# Altium PCB 驱动板.PcbDoc (part 2 of 3)
Units mil, origin at the board's own origin, x right, y up, seen from the top; angles counter-clockwise.
Board outline 6410.42 x 3130.03 mil, 2 copper layers (Top Layer, Bottom Layer); 60 components, 47 nets, 216 pads, 52 vias.
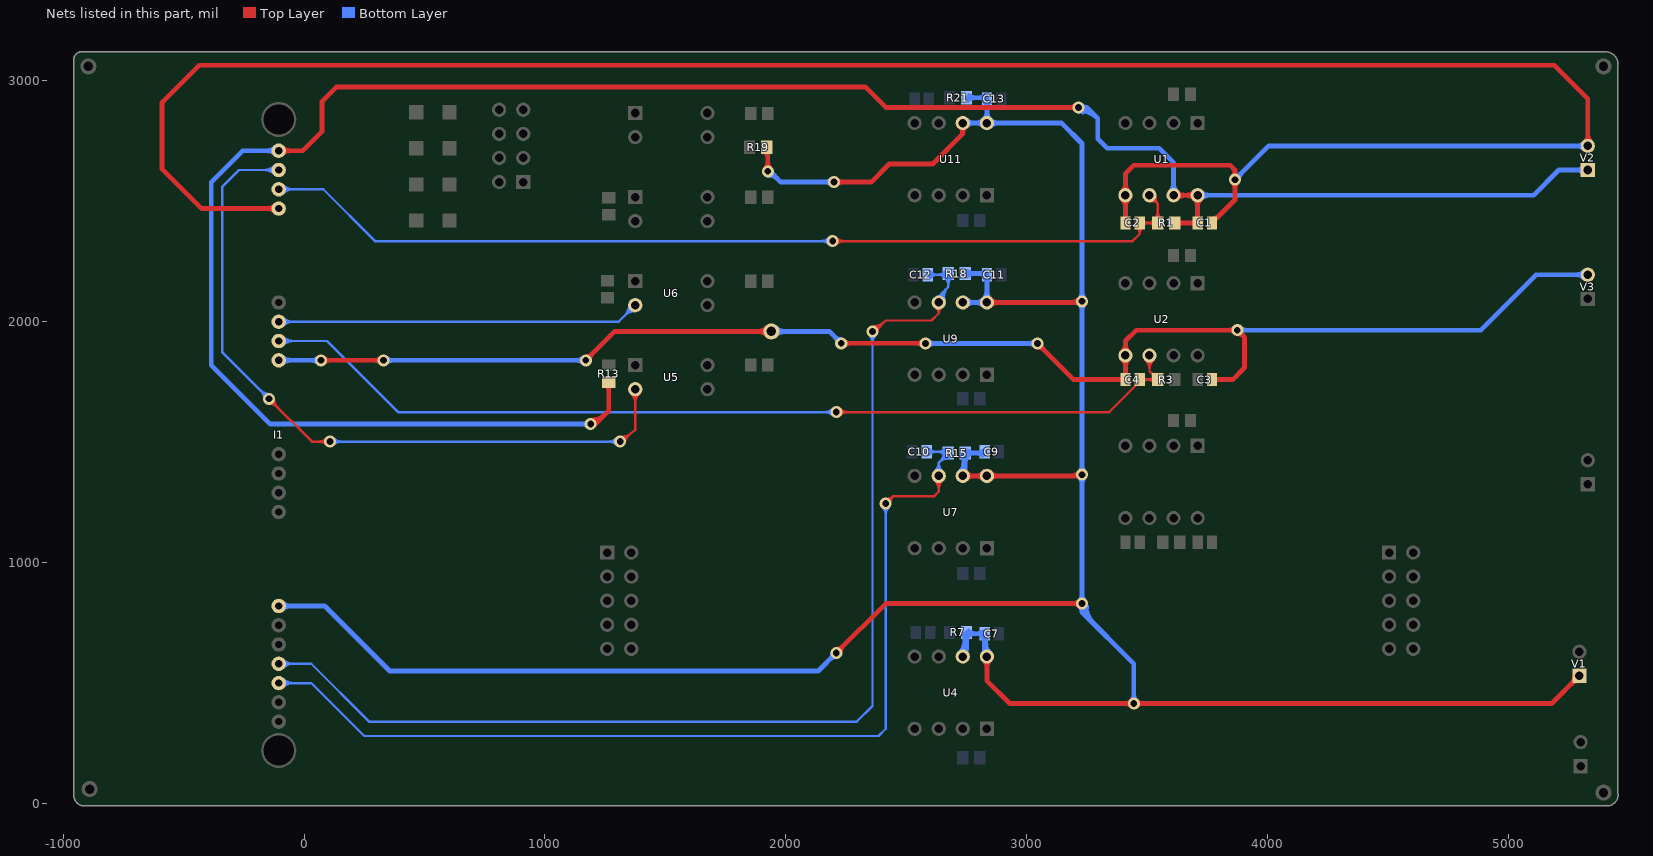
[diagram p2: the nets of this part, all layers, seen from the top]

## Via types
v1: diameter 50, hole 28, Top Layer to Bottom Layer, 52 vias

## Nets (pads, with @x,y where several pads share a name; then routed paths per layer and width w, separated by ;. In a path a pad name is that pad's centre, name@x,y a point inside that pad or via, vN(x,y) a via of type N, cw(c..) or ccw(c..) an arc to the next point about the centre after c; other vN are vias at no path point) (continued)
IPM_NVCC: C7.2 C9.2 C11.2 C13.2 I1.13 R7.1 R15.1 R18.1 R19.2 R21.1 U4.7 U4.8 U7.7 U7.8 U9.7 U9.8 U11.7 U11.8 V1.1 | length 18998.4
  Top Layer w20: v1(1925.43,2624.57) R19.2@1925.43,2725 ; v1(2200,2580) 2355,2580 2430,2655 2610,2655 2735,2780 ; v1(2210,625) 2415,830 v1(3230,830) ; U7.7@2735,1360 U7.8@2835,1360 3225,1360 v1(3230,1365) ; U11.7@2735,2825 2735,2780 ; U4.8@2835,610 2835,510 2930,415 5180,415 V1.1@5295,530 ; U9.8@2835,2080 3225,2080 v1(3230,2085) ; 1925.43,2660.78 cw(c1889.22,2660.78) 1914.83,2635.17 ccw(c1889.22,2660.78) 1925.43,2660.78 ; 1925.43,2660.78 ccw(c1961.65,2660.78) 1936.04,2635.17 cw(c1961.65,2660.78) 1925.43,2660.78 ; 2235.61,650.61 cw(c2210,676.21) 2210,640 ccw(c2210,676.21) 2235.61,650.61 ; 2235.61,650.61 ccw(c2261.21,625) 2225,625 cw(c2261.21,625) 2235.61,650.61 ; 2236.21,2580 cw(c2236.21,2616.21) 2210.61,2590.61 ccw(c2236.21,2616.21) 2236.21,2580 ; 2236.21,2580 ccw(c2236.21,2543.79) 2210.61,2569.39 cw(c2236.21,2543.79) 2236.21,2580 ; 2735,2780 cw(c2777.08,2780) 2748.34,2810.74 ccw(c2777.08,2780) 2735,2780 ; 2735,2780 ccw(c2692.92,2780) 2721.66,2810.74 cw(c2692.92,2780) 2735,2780 ; 2782.14,1360 cw(c2782.14,1407.14) 2748.81,1373.81 ccw(c2782.14,1407.14) 2782.14,1360 ; 2782.14,1360 ccw(c2782.14,1312.86) 2748.81,1346.19 cw(c2782.14,1312.86) 2782.14,1360 ; 2787.86,1360 cw(c2787.86,1312.86) 2821.19,1346.19 ccw(c2787.86,1312.86) 2787.86,1360 ; 2787.86,1360 ccw(c2787.86,1407.14) 2821.19,1373.81 cw(c2787.86,1407.14) 2787.86,1360 ; 2835,562.86 cw(c2882.14,562.86) 2848.81,596.19 ccw(c2882.14,562.86) 2835,562.86 ; 2835,562.86 ccw(c2787.86,562.86) 2821.19,596.19 cw(c2787.86,562.86) 2835,562.86 ; 2882.14,1360 cw(c2882.14,1407.14) 2848.81,1373.81 ccw(c2882.14,1407.14) 2882.14,1360 ; 2882.14,1360 ccw(c2882.14,1312.86) 2848.81,1346.19 cw(c2882.14,1312.86) 2882.14,1360 ; 2882.14,2080 cw(c2882.14,2127.14) 2848.81,2093.81 ccw(c2882.14,2127.14) 2882.14,2080 ; 2882.14,2080 ccw(c2882.14,2032.86) 2848.81,2066.19 cw(c2882.14,2032.86) 2882.14,2080 ; 3193.79,830 cw(c3193.79,793.79) 3219.39,819.39 ccw(c3193.79,793.79) 3193.79,830 ; 3193.79,830 ccw(c3193.79,866.21) 3219.39,840.61 cw(c3193.79,866.21) 3193.79,830 ; 3408.79,415 cw(c3408.79,378.79) 3434.39,404.39 ccw(c3408.79,378.79) 3408.79,415 ; 3408.79,415 ccw(c3408.79,451.21) 3434.39,425.61 cw(c3408.79,451.21) 3408.79,415 ; 3481.21,415 cw(c3481.21,451.21) 3455.61,425.61 ccw(c3481.21,451.21) 3481.21,415 ; 3481.21,415 ccw(c3481.21,378.79) 3455.61,404.39 cw(c3481.21,378.79) 3481.21,415 ; 5261.66,496.66 cw(c5295,463.33) 5295,510.47 ccw(c5295,463.33) 5261.66,496.66 ; 5261.66,496.66 ccw(c5228.33,530) 5275.47,530 cw(c5228.33,530) 5261.66,496.66 ; R19.2@1910.8,2711.43 cw(c1875.48,2676.11) 1925.43,2676.11 ccw(c1875.48,2676.11) R19.2@1910.8,2711.43 ; 3181.72,1360 ccw(c3181.72,1413.28) 3219.39,1375.61 cw(c3181.72,1413.28) 3181.72,1360 ; 3181.72,2080 ccw(c3181.72,2133.28) 3219.39,2095.61 cw(c3181.72,2133.28) 3181.72,2080
  Bottom Layer w20: I1.13@-105,820 85,820 355,550 2135,550 v1(2210,625) ; v1(1925.43,2624.57) 1935.43,2624.57 1980,2580 v1(2200,2580) ; U4.7@2735,610 2735,630 2750.43,645.43 ; U7.7@2735,1360 2745.43,1370.43 R15.1@2745.43,1455 2820.47,1455 C9.2@2825.47,1460 ; U9.7@2735,2080 U9.8@2835,2080 2835.47,2080.47 C11.2@2835.47,2195 2830.47,2200 R18.1@2745.43,2200 ; U11.7@2735,2825 U11.8@2835,2825 ; 2741.58,659.13 ccw(c2765,645.61) U4.7@2747.58,624.94 ; R21.1@2750.43,2930 2830.47,2930 C13.2@2835.47,2925 2835,2924.53 U11.8@2835,2825 ; U4.8@2835,610 2825.47,619.53 C7.2@2825.47,705 2755.43,705 R7.1@2750.43,710 2750.43,645.43 ; 3231.69,805.03 ccw(c3212.64,799.93) 3222.5,817.01 cw(c3179.66,742.81) 3262.42,764.98 ; v1@3232.5,834.33 cw(c3213.8,801.94) 3249.92,811.62 ; 3232.54,801.87 cw(c3246.49,805.61) v1@3238.4,817.57 ; v1(3445,415) 3445,580 3230,795 ; -56.72,820 cw(c-56.72,868.28) -90.86,834.14 ccw(c-56.72,868.28) -56.72,820 ; -56.72,820 ccw(c-56.72,771.72) -90.86,805.86 cw(c-56.72,771.72) -56.72,820 ; 2163.79,2580 cw(c2163.79,2543.79) 2189.39,2569.39 ccw(c2163.79,2543.79) 2163.79,2580 ; 2163.79,2580 ccw(c2163.79,2616.21) 2189.39,2590.61 cw(c2163.79,2616.21) 2163.79,2580 ; 2184.39,599.39 cw(c2210,573.79) 2210,610 ccw(c2210,573.79) 2184.39,599.39 ; 2184.39,599.39 ccw(c2158.79,625) 2195,625 cw(c2158.79,625) 2184.39,599.39 ; R15.1@2733.64,1444.25 cw(c2690.82,1419.53) 2738.57,1406.73 ; R15.1@2733.64,1444.25 cw(c2690.82,1419.53) 2738.57,1406.73 ; R15.1@2733.64,1444.25 cw(c2690.82,1419.53) 2738.57,1406.73 ; R7.1@2738.64,699.25 cw(c2701.23,677.66) 2742.95,666.48 ; R7.1@2738.64,699.25 cw(c2701.23,677.66) 2742.95,666.48 ; R7.1@2738.64,699.25 cw(c2701.23,677.66) 2742.95,666.48 ; 2745.43,1418.18 cw(c2778.32,1418.18) 2755.06,1441.43 ccw(c2778.32,1418.18) 2745.43,1418.18 ; 2745.43,1418.18 ccw(c2712.55,1418.18) 2735.8,1441.43 cw(c2712.55,1418.18) 2745.43,1418.18 ; 2746.72,680.56 cw(c2768.53,674.71) R7.1@2757.24,694.27 ; 2746.72,680.56 cw(c2768.53,674.71) R7.1@2757.24,694.27 ; 2746.72,680.56 cw(c2768.53,674.71) R7.1@2757.24,694.27 ; 2750.43,645.43 cw(c2734.52,645.43) 2734.74,629.53 ccw(c2734.52,645.43) 2750.43,645.43 ; 2750.43,645.43 ccw(c2762.11,633.75) 2749.69,622.87 cw(c2762.11,633.75) 2750.43,645.43 ; 2750.43,673.18 cw(c2783.32,673.18) R7.1@2760.06,696.43 ; 2750.43,673.18 ccw(c2717.55,673.18) 2740.8,696.43 cw(c2717.55,673.18) 2750.43,673.18 ; 2750.43,673.18 cw(c2783.32,673.18) R7.1@2760.06,696.43 ; R7.1@2760.06,696.43 cw(c2780.75,675.74) 2780.75,705 ccw(c2780.75,675.74) R7.1@2760.06,696.43 ; 2778.32,1455 cw(c2778.32,1487.89) 2755.06,1464.63 ccw(c2778.32,1487.89) 2778.32,1455 ; 2778.32,1455 ccw(c2778.32,1422.11) 2755.06,1445.37 cw(c2778.32,1422.11) 2778.32,1455 ; 2778.32,2200 cw(c2778.32,2232.89) 2755.06,2209.63 ccw(c2778.32,2232.89) 2778.32,2200 ; 2778.32,2200 ccw(c2778.32,2167.11) 2755.06,2190.37 cw(c2778.32,2167.11) 2778.32,2200 ; 2782.14,2080 cw(c2782.14,2127.14) 2748.81,2093.81 ccw(c2782.14,2127.14) 2782.14,2080 ; 2782.14,2080 ccw(c2782.14,2032.86) 2748.81,2066.19 cw(c2782.14,2032.86) 2782.14,2080 ; 2782.14,2825 cw(c2782.14,2872.14) 2748.81,2838.81 ccw(c2782.14,2872.14) 2782.14,2825 ; 2782.14,2825 ccw(c2782.14,2777.86) 2748.81,2811.19 cw(c2782.14,2777.86) 2782.14,2825 ; 2783.32,2930 cw(c2783.32,2962.89) 2760.06,2939.63 ccw(c2783.32,2962.89) 2783.32,2930 ; 2783.32,2930 ccw(c2783.32,2897.11) 2760.06,2920.37 cw(c2783.32,2897.11) 2783.32,2930 ; 2787.86,2080 cw(c2787.86,2032.86) 2821.19,2066.19 ccw(c2787.86,2032.86) 2787.86,2080 ; 2787.86,2080 ccw(c2787.86,2127.14) U9.8@2821.19,2093.81 ; 2787.86,2080 ccw(c2787.86,2127.14) U9.8@2821.19,2093.81 ; 2787.86,2825 cw(c2787.86,2777.86) 2821.19,2811.19 ccw(c2787.86,2777.86) 2787.86,2825 ; 2787.86,2825 ccw(c2787.86,2872.14) U11.8@2821.19,2838.81 ; 2787.86,2825 ccw(c2787.86,2872.14) U11.8@2821.19,2838.81 ; 2797.34,705 cw(c2797.34,676.87) 2817.23,696.76 ccw(c2797.34,676.87) 2797.34,705 ; 2797.34,705 ccw(c2797.34,733.13) 2817.23,713.24 cw(c2797.34,733.13) 2797.34,705 ; U9.8@2821.19,2093.81 ccw(c2786.72,2128.28) 2835.47,2128.28 cw(c2786.72,2128.28) U9.8@2821.19,2093.81 ; U11.8@2821.19,2838.81 ccw(c2787.86,2872.14) 2835,2872.14 ; U11.8@2821.19,2838.81 ccw(c2787.86,2872.14) 2835,2872.14 ; 2825.47,670.96 cw(c2853.61,670.96) 2833.71,690.85 ccw(c2853.61,670.96) 2825.47,670.96 ; 2825.47,670.96 ccw(c2797.34,670.96) 2817.23,690.85 cw(c2797.34,670.96) 2825.47,670.96 ; 2831.08,659.21 cw(c2874.43,670.83) C7.2@2835.56,693.27 ; 2831.08,659.21 cw(c2874.43,670.83) C7.2@2835.56,693.27 ; 2831.08,659.21 cw(c2874.43,670.83) C7.2@2835.56,693.27 ; U11.8@2835,2825 3145,2825 3230,2740 v1(3230,2085) v1(3230,1365) 3230,795 ; 2835,2872.14 ccw(c2882.14,2872.14) U11.8@2848.81,2838.81 ; 2835,2872.14 ccw(c2882.14,2872.14) U11.8@2848.81,2838.81 ; 2835.47,2160.96 cw(c2863.61,2160.96) 2843.71,2180.85 ccw(c2863.61,2160.96) 2835.47,2160.96 ; 2835.47,2160.96 ccw(c2807.34,2160.96) 2827.23,2180.85 cw(c2807.34,2160.96) 2835.47,2160.96 ; U11.8@2848.81,2838.81 ccw(c2882.14,2872.14) 2882.14,2825 ; U11.8@2848.81,2838.81 ccw(c2882.14,2872.14) 2882.14,2825 ; 2882.14,2825 ccw(c2882.14,2777.86) 2848.81,2811.19 cw(c2882.14,2777.86) 2882.14,2825 ; 3230,795 cw(c3263.33,795) 3240.34,819.14 ccw(c3263.33,795) 3230,795 ; 3230,795 ccw(c3196.67,795) 3219.66,819.14 cw(c3196.67,795) 3230,795 ; 3230,866.21 cw(c3193.79,866.21) 3219.39,840.61 ccw(c3193.79,866.21) 3230,866.21 ; 3230,866.21 ccw(c3266.21,866.21) 3240.61,840.61 cw(c3266.21,866.21) 3230,866.21 ; 3230,1328.79 cw(c3266.21,1328.79) 3240.61,1354.39 ccw(c3266.21,1328.79) 3230,1328.79 ; 3230,1328.79 ccw(c3193.79,1328.79) 3219.39,1354.39 cw(c3193.79,1328.79) 3230,1328.79 ; 3230,1401.21 cw(c3193.79,1401.21) 3219.39,1375.61 ccw(c3193.79,1401.21) 3230,1401.21 ; 3230,1401.21 ccw(c3266.21,1401.21) 3240.61,1375.61 cw(c3266.21,1401.21) 3230,1401.21 ; 3230,2048.79 cw(c3266.21,2048.79) 3240.61,2074.39 ccw(c3266.21,2048.79) 3230,2048.79 ; 3230,2048.79 ccw(c3193.79,2048.79) 3219.39,2074.39 cw(c3193.79,2048.79) 3230,2048.79 ; 3230,2121.21 cw(c3193.79,2121.21) 3219.39,2095.61 ccw(c3193.79,2121.21) 3230,2121.21 ; 3230,2121.21 ccw(c3266.21,2121.21) 3240.61,2095.61 cw(c3266.21,2121.21) 3230,2121.21 ; 3445,451.21 cw(c3408.79,451.21) 3434.39,425.61 ccw(c3408.79,451.21) 3445,451.21 ; 3445,451.21 ccw(c3481.21,451.21) 3455.61,425.61 cw(c3481.21,451.21) 3445,451.21 ; v1@1925.43,2609.57 cw(c1925.43,2549.21) 1968.11,2591.89 ccw(c1925.43,2549.21) v1@1925.43,2609.57 ; U4.7@2721.19,623.81 ccw(c2650.6,694.4) 2750.43,694.4 cw(c2650.6,694.4) U4.7@2721.19,623.81 ; U7.7@2721.19,1373.81 ccw(c2662.67,1432.33) 2745.43,1432.33 cw(c2662.67,1432.33) U7.7@2721.19,1373.81 ; U4.7@2735.33,609.67 ccw(c2698.88,646.12) 2750.43,646.12 cw(c2698.88,646.12) U4.7@2735.33,609.67 ; R7.1@2760.06,715.7 ccw(c2785.88,741.52) 2785.88,705 cw(c2785.88,741.52) R7.1@2760.06,715.7 ; 2795.15,1455 cw(c2795.15,1423.77) 2817.23,1445.85 ccw(c2795.15,1423.77) 2795.15,1455 ; 2799.52,1455 ccw(c2799.52,1480.04) 2817.23,1462.33 cw(c2799.52,1480.04) 2799.52,1455 ; 2805.15,2200 ccw(c2805.15,2231.23) 2827.23,2209.15 cw(c2805.15,2231.23) 2805.15,2200 ; 2805.15,2930 ccw(c2805.15,2961.23) 2827.23,2939.15 cw(c2805.15,2961.23) 2805.15,2930 ; 2809.52,2200 cw(c2809.52,2174.96) 2827.23,2192.67 ccw(c2809.52,2174.96) 2809.52,2200 ; 2809.52,2930 cw(c2809.52,2904.96) 2827.23,2922.67 ccw(c2809.52,2904.96) 2809.52,2930 ; C7.2@2825.47,680.15 ccw(c2905.15,680.15) 2848.81,623.81 cw(c2905.15,680.15) C7.2@2825.47,680.15 ; C13.2@2827.23,2910.85 cw(c2808.48,2892.1) 2835,2892.1 ccw(c2808.48,2892.1) C13.2@2827.23,2910.85 ; 2835,2889.82 cw(c2864.75,2889.82) 2843.71,2910.85 ccw(c2864.75,2889.82) 2835,2889.82 ; 2835.47,2126 ccw(c2881,2126) 2848.81,2093.81 cw(c2881,2126) 2835.47,2126 ; v1@3225,830 ccw(c3297.43,830) 3246.21,778.79 cw(c3297.43,830) v1@3225,830 ; v1@3245,830 ccw(c3365.71,830) 3280.36,744.64 cw(c3365.71,830) v1@3245,830
IPM_UFO: I1.2 U5.2 | length 4735
  Top Layer w10: -119.8,1653.25 cw(c-110.76,1687.01) v1(-145,1680) ; -118.25,1654.8 ccw(c-152.01,1645.76) v1(-145,1680) ; v1(107.5,1502.5) 32.5,1502.5 v1(-145,1680) ; v1@1304.59,1508.62 cw(c1337.65,1483.02) 1332.38,1524.5 ; 1339.65,1517.28 cw(c1316.84,1526.86) v1(1312.5,1502.5) 1375,1550 U5.2@1375,1720 ; -110.86,1645.86 cw(c-76.72,1680) -125,1680 ccw(c-76.72,1680) -110.86,1645.86 ; -110.86,1645.86 ccw(c-145,1611.72) -145,1660 cw(c-145,1611.72) -110.86,1645.86 ; 59.22,1502.5 cw(c59.22,1454.22) 93.36,1488.36 ccw(c59.22,1454.22) 59.22,1502.5 ; 59.22,1502.5 ccw(c59.22,1550.78) 93.36,1516.64 cw(c59.22,1550.78) 59.22,1502.5 ; 1350.94,1531.72 cw(c1321.73,1570.16) 1315.2,1522.32 ccw(c1321.73,1570.16) 1350.94,1531.72 ; 1350.94,1531.72 ccw(c1380.16,1493.27) 1332.32,1499.8 cw(c1380.16,1493.27) 1350.94,1531.72 ; 1375,1660.79 cw(c1434.21,1660.79) 1392.34,1702.66 ccw(c1434.21,1660.79) 1375,1660.79 ; 1375,1660.79 ccw(c1315.79,1660.79) 1357.66,1702.66 cw(c1315.79,1660.79) 1375,1660.79 ; 1375,1684.93 cw(c1410.07,1684.93) 1385.27,1709.73 ccw(c1410.07,1684.93) 1375,1684.93 ; 1375,1684.93 ccw(c1339.93,1684.93) 1364.73,1709.73 cw(c1339.93,1684.93) 1375,1684.93
  Bottom Layer w10: -171.75,1705.2 ccw(c-137.99,1714.24) v1(-145,1680) ; -170.2,1706.75 cw(c-179.24,1672.99) v1(-145,1680) ; I1.2@-105,2630 -270,2630 -340,2560 -340,1875 v1(-145,1680) ; v1(107.5,1502.5) v1(1312.5,1502.5) ; -179.14,1714.14 cw(c-213.28,1680) -165,1680 ccw(c-213.28,1680) -179.14,1714.14 ; -179.14,1714.14 ccw(c-145,1748.28) -145,1700 cw(c-145,1748.28) -179.14,1714.14 ; -165.36,2630 cw(c-165.36,2569.64) -122.68,2612.32 ccw(c-165.36,2569.64) -165.36,2630 ; -165.36,2630 ccw(c-165.36,2690.36) -122.68,2647.68 cw(c-165.36,2690.36) -165.36,2630 ; -141.21,2630 cw(c-141.21,2593.79) -115.61,2619.39 ccw(c-141.21,2593.79) -141.21,2630 ; -141.21,2630 ccw(c-141.21,2666.21) -115.61,2640.61 cw(c-141.21,2666.21) -141.21,2630 ; 155.78,1502.5 cw(c155.78,1550.78) 121.64,1516.64 ccw(c155.78,1550.78) 155.78,1502.5 ; 155.78,1502.5 ccw(c155.78,1454.22) 121.64,1488.36 cw(c155.78,1454.22) 155.78,1502.5 ; 1264.22,1502.5 cw(c1264.22,1454.22) 1298.36,1488.36 ccw(c1264.22,1454.22) 1264.22,1502.5 ; 1264.22,1502.5 ccw(c1264.22,1550.78) 1298.36,1516.64 cw(c1264.22,1550.78) 1264.22,1502.5
IPM_UGND: C1.1 C2.1 I1.4 U1.5 V2.2 | length 10771.4
  Top Layer w20: I1.4@-105,2470 -425,2470 -590,2635 -590,2910 -435,3065 5190,3065 5330,2925 V2.2@5330,2730 ; C2.1@3410.47,2410 3410.47,2524.53 U1.5@3410,2525 3410,2615 3445,2650 3845,2650 3865,2630 v1(3865,2590) 3865,2505.47 C1.1@3769.53,2410 ; -153.28,2470 cw(c-153.28,2421.72) -119.14,2455.86 ccw(c-153.28,2421.72) -153.28,2470 ; -153.28,2470 ccw(c-153.28,2518.28) -119.14,2484.14 cw(c-153.28,2518.28) -153.28,2470 ; 3410,2572.14 cw(c3362.86,2572.14) 3396.19,2538.81 ccw(c3362.86,2572.14) 3410,2572.14 ; 3410,2572.14 ccw(c3457.14,2572.14) 3423.81,2538.81 cw(c3457.14,2572.14) 3410,2572.14 ; 3410.47,2444.04 cw(c3382.34,2444.04) 3402.23,2424.15 ccw(c3382.34,2444.04) 3410.47,2444.04 ; 3410.47,2444.04 ccw(c3438.61,2444.04) 3418.71,2424.15 cw(c3438.61,2444.04) 3410.47,2444.04 ; 3865,2553.79 cw(c3901.21,2553.79) 3875.61,2579.39 ccw(c3901.21,2553.79) 3865,2553.79 ; 3865,2553.79 ccw(c3828.79,2553.79) 3854.39,2579.39 cw(c3828.79,2553.79) 3865,2553.79 ; 3865,2626.21 cw(c3828.79,2626.21) 3854.39,2600.61 ccw(c3828.79,2626.21) 3865,2626.21 ; 3865,2626.21 ccw(c3901.21,2626.21) 3875.61,2600.61 cw(c3901.21,2626.21) 3865,2626.21 ; 5330,2777.14 cw(c5282.86,2777.14) 5316.19,2743.81 ccw(c5282.86,2777.14) 5330,2777.14 ; 5330,2777.14 ccw(c5377.14,2777.14) 5343.81,2743.81 cw(c5377.14,2777.14) 5330,2777.14 ; U1.5@3396.19,2511.19 cw(c3361.72,2476.72) 3410.47,2476.72 ccw(c3361.72,2476.72) U1.5@3396.19,2511.19 ; 3410.47,2479 cw(c3456,2479) 3423.81,2511.19 ccw(c3456,2479) 3410.47,2479 ; C1.1@3769.53,2427.56 ccw(c3769.53,2469.95) 3799.5,2439.98 cw(c3769.53,2469.95) C1.1@3769.53,2427.56
  Bottom Layer w20: v1(3865,2590) 4005,2730 V2.2@5330,2730 ; 3890.61,2615.61 cw(c3865,2641.21) 3865,2605 ccw(c3865,2641.21) 3890.61,2615.61 ; 3890.61,2615.61 ccw(c3916.21,2590) 3880,2590 cw(c3916.21,2590) 3890.61,2615.61 ; 5282.86,2730 cw(c5282.86,2682.86) 5316.19,2716.19 ccw(c5282.86,2682.86) 5282.86,2730 ; 5282.86,2730 ccw(c5282.86,2777.14) 5316.19,2743.81 cw(c5282.86,2777.14) 5282.86,2730
IPM_UN: C12.2 I1.16 R18.2 U9.6 | length 6385.3
  Top Layer w10: v1@2350.63,1963.48 cw(c2380.74,1952.3) 2372.43,1983.33 ; v1@2369.92,1958.71 cw(c2391.5,1955.9) 2385.87,1976.93 ; v1@2370,1977.32 ccw(c2377.65,1990.58) 2381.61,1975.79 ; 2391.13,1988.34 ccw(c2403,1944.04) v1(2360,1960) 2370,1960 2415,2005 2605,2005 2635,2035 ; U9.6@2635,2080 2635,2035 ; 2635,2035 cw(c2664.01,2035) 2648.29,2059.39 ccw(c2664.01,2035) 2635,2035 ; 2635,2035 ccw(c2605.99,2035) 2621.71,2059.39 cw(c2605.99,2035) 2635,2035 ; v1@2360,1970 ccw(c2360,2018.28) 2394.14,1984.14 cw(c2360,2018.28) v1@2360,1970 ; v1@2360,1980 ccw(c2360,2052.43) 2411.21,2001.21 cw(c2360,2052.43) v1@2360,1980 ; v1@2380,1960 cw(c2404.14,1960) 2387.07,1977.07 ccw(c2404.14,1960) v1@2380,1960
  Bottom Layer w10: I1.16@-105,580 30,580 270,340 2295,340 2360,405 v1@2360,1955 ; C12.2@2589.53,2195 2669.57,2195 R18.2@2674.57,2200 2674.57,2144.57 ; U9.6@2635,2080 2635,2105 2674.57,2144.57 ; U9.6@2645.87,2068.99 ccw(c2615.28,2099.97) 2658.81,2099.7 ; -68.79,580 cw(c-68.79,616.21) -94.39,590.61 ccw(c-68.79,616.21) -68.79,580 ; -68.79,580 ccw(c-68.79,543.79) -94.39,569.39 cw(c-68.79,543.79) -68.79,580 ; -44.64,580 cw(c-44.64,640.36) -87.32,597.68 ccw(c-44.64,640.36) -44.64,580 ; -44.64,580 ccw(c-44.64,519.64) -87.32,562.32 cw(c-44.64,519.64) -44.64,580 ; 2360,1911.72 cw(c2408.28,1911.72) 2374.14,1945.86 ccw(c2408.28,1911.72) 2360,1911.72 ; 2360,1911.72 ccw(c2311.72,1911.72) 2345.86,1945.86 cw(c2311.72,1911.72) 2360,1911.72 ; 2629.73,2195 cw(c2629.73,2235.21) 2601.3,2206.78 ccw(c2629.73,2235.21) 2629.73,2195 ; 2629.73,2195 ccw(c2629.73,2154.79) 2601.3,2183.22 cw(c2629.73,2154.79) 2629.73,2195 ; R18.2@2661.4,2182.9 ccw(c2632.17,2153.67) 2632.17,2195 cw(c2632.17,2153.67) R18.2@2661.4,2182.9 ; R18.2@2661.4,2182.9 cw(c2629.61,2151.11) 2674.57,2151.11 ; R18.2@2661.4,2182.9 cw(c2629.61,2151.11) 2674.57,2151.11 ; 2674.56,2144.56 ccw(c2717.56,2101.57) 2658.73,2086.2 cw(c2717.56,2101.57) 2674.56,2144.56 ; 2674.57,2151.11 cw(c2719.52,2151.11) 2687.73,2182.9 ccw(c2719.52,2151.11) 2674.57,2151.11 ; 2627.04,2195 ccw(c2627.04,2243.59) 2661.4,2209.23 cw(c2627.04,2243.59) 2627.04,2195 ; U9.6@2639.38,2081.14 cw(c2678.43,2091.35) 2649.89,2119.89 ccw(c2678.43,2091.35) U9.6@2639.38,2081.14 ; U9.6@2649.06,2083.67 cw(c2697.99,2096.46) 2662.23,2132.23 ccw(c2697.99,2096.46) U9.6@2649.06,2083.67
IPM_UP: C2.2 I1.3 R1.2 U1.6 | length 5268.4
  Top Layer w10: v1(2195,2335) 3440,2335 3469.53,2364.53 ; U1.6@3497.86,2515.41 ccw(c3532.02,2542.39) 3526.94,2499.15 ; U1.6@3510,2525 3544.57,2490.43 ; U1.6@3519.59,2537.14 cw(c3492.61,2502.98) 3535.85,2508.06 ; 2243.28,2335 cw(c2243.28,2383.28) 2209.14,2349.14 ccw(c2243.28,2383.28) 2243.28,2335 ; 2243.28,2335 ccw(c2243.28,2286.72) 2209.14,2320.86 cw(c2243.28,2286.72) 2243.28,2335 ; 3469.53,2364.53 cw(c3508.2,2364.53) 3481.17,2392.18 ccw(c3508.2,2364.53) 3469.53,2364.53 ; 3469.53,2364.53 ccw(c3430.86,2364.53) 3457.89,2392.18 cw(c3430.86,2364.53) 3469.53,2364.53 ; 3469.53,2364.53 C2.2@3469.53,2410 R1.2@3544.57,2410 3544.57,2490.43 ; 3499.61,2410 cw(c3499.61,2365.04) 3531.4,2396.83 ccw(c3499.61,2365.04) 3499.61,2410 ; 3499.61,2410 ccw(c3499.61,2454.96) 3531.4,2423.17 cw(c3499.61,2454.96) 3499.61,2410 ; 3509.73,2410 cw(c3509.73,2450.21) 3481.3,2421.78 ccw(c3509.73,2450.21) 3509.73,2410 ; 3509.73,2410 ccw(c3509.73,2369.79) 3481.3,2398.22 cw(c3509.73,2369.79) 3509.73,2410 ; 3544.57,2458.89 cw(c3499.61,2458.89) 3531.4,2427.1 ccw(c3499.61,2458.89) 3544.57,2458.89 ; 3544.57,2458.89 ccw(c3589.52,2458.89) 3557.73,2427.1 cw(c3589.52,2458.89) 3544.57,2458.89 ; 3544.56,2490.44 cw(c3570.33,2516.21) 3534.27,2521.46 ccw(c3570.33,2516.21) 3544.56,2490.44 ; 3544.56,2490.44 ccw(c3518.79,2464.67) 3513.54,2500.73 cw(c3518.79,2464.67) 3544.56,2490.44
  Bottom Layer w10: I1.3@-105,2550 80,2550 295,2335 v1(2195,2335) ; -68.79,2550 cw(c-68.79,2586.21) -94.39,2560.61 ccw(c-68.79,2586.21) -68.79,2550 ; -68.79,2550 ccw(c-68.79,2513.79) -94.39,2539.39 cw(c-68.79,2513.79) -68.79,2550 ; -44.64,2550 cw(c-44.64,2610.36) -87.32,2567.68 ccw(c-44.64,2610.36) -44.64,2550 ; -44.64,2550 ccw(c-44.64,2489.64) -87.32,2532.32 cw(c-44.64,2489.64) -44.64,2550 ; 2146.72,2335 cw(c2146.72,2286.72) 2180.86,2320.86 ccw(c2146.72,2286.72) 2146.72,2335 ; 2146.72,2335 ccw(c2146.72,2383.28) 2180.86,2349.14 cw(c2146.72,2383.28) 2146.72,2335
IPM_UVCC: C1.2 I1.1 R1.1 R13.2 U1.7 U1.8 V2.1 | length 11616
  Top Layer w20: I1.1@-105,2710 -5,2710 75,2790 75,2915 135,2975 2330,2975 2415,2890 v1(3215,2890) ; v1@1185.67,1577.5 cw(c1218.06,1558.8) 1208.38,1594.92 ; v1(1190,1575) 1210,1575 1265,1630 R13.2@1265,1749.57 ; U1.7@3610,2525 U1.8@3710,2525 3710,2410.47 C1.2@3710.47,2410 R1.1@3615.43,2410 ; -56.72,2710 cw(c-56.72,2758.28) -90.86,2724.14 ccw(c-56.72,2758.28) -56.72,2710 ; -56.72,2710 ccw(c-56.72,2661.72) -90.86,2695.86 cw(c-56.72,2661.72) -56.72,2710 ; 1265,1716.68 cw(c1297.89,1716.68) 1274.63,1739.93 ccw(c1297.89,1716.68) 1265,1716.68 ; 1265,1716.68 ccw(c1232.11,1716.68) 1255.37,1739.93 cw(c1232.11,1716.68) 1265,1716.68 ; 3178.79,2890 cw(c3178.79,2853.79) 3204.39,2879.39 ccw(c3178.79,2853.79) 3178.79,2890 ; 3178.79,2890 ccw(c3178.79,2926.21) 3204.39,2900.61 cw(c3178.79,2926.21) 3178.79,2890 ; 3648.32,2410 cw(c3648.32,2442.89) 3625.07,2419.63 ccw(c3648.32,2442.89) 3648.32,2410 ; 3648.32,2410 ccw(c3648.32,2377.11) 3625.07,2400.37 cw(c3648.32,2377.11) 3648.32,2410 ; 3657.14,2525 cw(c3657.14,2572.14) 3623.81,2538.81 ccw(c3657.14,2572.14) 3657.14,2525 ; 3657.14,2525 ccw(c3657.14,2477.86) 3623.81,2511.19 cw(c3657.14,2477.86) 3657.14,2525 ; 3662.86,2525 cw(c3662.86,2477.86) U1.8@3696.19,2511.19 ; 3662.86,2525 ccw(c3662.86,2572.14) 3696.19,2538.81 cw(c3662.86,2572.14) 3662.86,2525 ; 3662.86,2525 cw(c3662.86,2477.86) U1.8@3696.19,2511.19 ; 3682.34,2410 cw(c3682.34,2381.87) 3702.23,2401.76 ccw(c3682.34,2381.87) 3682.34,2410 ; 3682.34,2410 ccw(c3682.34,2438.13) 3702.23,2418.24 cw(c3682.34,2438.13) 3682.34,2410 ; U1.8@3696.19,2511.19 cw(c3662.86,2477.86) 3710,2477.86 ; U1.8@3696.19,2511.19 cw(c3662.86,2477.86) 3710,2477.86 ; 3710,2477.86 cw(c3757.14,2477.86) 3723.81,2511.19 ccw(c3757.14,2477.86) 3710,2477.86 ; v1@1190,1570 ccw(c1190,1606.21) 1215.61,1580.61 cw(c1190,1606.21) v1@1190,1570 ; v1@1190,1590 ccw(c1190,1674.5) 1249.75,1614.75 cw(c1190,1674.5) v1@1190,1590 ; C1.2@3702.23,2424.15 ccw(c3683.48,2442.9) 3710,2442.9 cw(c3683.48,2442.9) C1.2@3702.23,2424.15 ; 3710,2445.18 ccw(c3739.75,2445.18) 3718.71,2424.15 cw(c3739.75,2445.18) 3710,2445.18
  Bottom Layer w20: I1.1@-105,2710 -255,2710 -385,2580 -385,1820 -140,1575 v1(1190,1575) ; v1@3210.83,2887.25 ccw(c3242.04,2907.85) 3234.54,2871.21 ; v1(3215,2890) 3250,2890 ; U1.7@3610,2525 3610,2660 3550,2720 3335,2720 3295,2760 3295,2845 ; U1.8@3710,2525 5105,2525 5210,2630 V2.1@5330,2630 ; -153.28,2710 cw(c-153.28,2661.72) -119.14,2695.86 ccw(c-153.28,2661.72) -153.28,2710 ; -153.28,2710 ccw(c-153.28,2758.28) -119.14,2724.14 cw(c-153.28,2758.28) -153.28,2710 ; 1153.79,1575 cw(c1153.79,1538.79) 1179.39,1564.39 ccw(c1153.79,1538.79) 1153.79,1575 ; 1153.79,1575 ccw(c1153.79,1611.21) 1179.39,1585.61 cw(c1153.79,1611.21) 1153.79,1575 ; 3250,2890 cw(c3250,2923.33) 3225.86,2900.34 ccw(c3250,2923.33) 3250,2890 ; 3250,2890 ccw(c3250,2856.67) 3225.86,2879.66 cw(c3250,2856.67) 3250,2890 ; 3250,2890 3295,2845 ; 3295,2845 ccw(c3222.07,2772.08) 3215.9,2875.03 cw(c3222.07,2772.08) 3295,2845 ; 3610,2572.14 cw(c3562.86,2572.14) 3596.19,2538.81 ccw(c3562.86,2572.14) 3610,2572.14 ; 3610,2572.14 ccw(c3657.14,2572.14) 3623.81,2538.81 cw(c3657.14,2572.14) 3610,2572.14 ; 3757.14,2525 cw(c3757.14,2572.14) 3723.81,2538.81 ccw(c3757.14,2572.14) 3757.14,2525 ; 3757.14,2525 ccw(c3757.14,2477.86) 3723.81,2511.19 cw(c3757.14,2477.86) 3757.14,2525 ; 5282.86,2630 cw(c5282.86,2582.86) 5316.19,2616.19 ccw(c5282.86,2582.86) 5282.86,2630 ; 5282.86,2630 ccw(c5282.86,2677.14) 5316.19,2643.81 cw(c5282.86,2677.14) 5282.86,2630 ; v1@3214.7,2894.99 cw(c3218.51,2831.41) 3263.55,2876.45 ccw(c3218.51,2831.41) v1@3214.7,2894.99
IPM_VFO: I1.6 U6.2 | length 2193.2
  Bottom Layer w10: I1.6@-105,2000 1306.11,2000 U6.2@1375,2068.89 ; 1344.48,2046.54 cw(c1381.61,2036.59) U6.2@1373.9,2074.25 ; 1352.65,2038.37 ccw(c1342.7,2075.5) U6.2@1380.36,2067.79 ; -68.79,2000 cw(c-68.79,2036.21) -94.39,2010.61 ccw(c-68.79,2036.21) -68.79,2000 ; -68.79,2000 ccw(c-68.79,1963.79) -94.39,1989.39 cw(c-68.79,1963.79) -68.79,2000 ; -44.64,2000 cw(c-44.64,2060.36) -87.32,2017.68 ccw(c-44.64,2060.36) -44.64,2000 ; -44.64,2000 ccw(c-44.64,1939.64) -87.32,1982.32 cw(c-44.64,1939.64) -44.64,2000 ; 1333.13,2027.02 cw(c1375,1985.15) 1375,2044.36 ccw(c1375,1985.15) 1333.13,2027.02 ; 1333.13,2027.02 ccw(c1291.26,2068.89) 1350.47,2068.89 cw(c1291.26,2068.89) 1333.13,2027.02 ; 1350.2,2044.09 cw(c1375,2019.29) 1375,2054.36 ccw(c1375,2019.29) 1350.2,2044.09 ; 1350.2,2044.09 ccw(c1325.4,2068.89) 1360.47,2068.89 cw(c1325.4,2068.89) 1350.2,2044.09
IPM_VGND: C3.1 C4.1 I1.8 pad.0 U2.5 V3.2 | length 9089.3
  Top Layer w20: v1(70,1840) v1(330,1840) ; v1(1170,1840) 1290,1960 pad.0@1940,1960 ; v1(2230.41,1910.41) 2579.59,1910.41 v1(2580,1910) ; v1(3045,1910) 3195,1760 C4.1@3410.47,1760 3410,1760.47 U2.5@3410,1860 3410,1920 3455,1965 v1(3875,1965) 3905,1935 3905,1810 3855,1760 C3.1@3769.53,1760 ; 106.21,1840 cw(c106.21,1876.21) 80.61,1850.61 ccw(c106.21,1876.21) 106.21,1840 ; 106.21,1840 ccw(c106.21,1803.79) 80.61,1829.39 cw(c106.21,1803.79) 106.21,1840 ; 293.79,1840 cw(c293.79,1803.79) 319.39,1829.39 ccw(c293.79,1803.79) 293.79,1840 ; 293.79,1840 ccw(c293.79,1876.21) 319.39,1850.61 cw(c293.79,1876.21) 293.79,1840 ; 1195.61,1865.61 cw(c1170,1891.21) 1170,1855 ccw(c1170,1891.21) 1195.61,1865.61 ; 1195.61,1865.61 ccw(c1221.21,1840) 1185,1840 cw(c1221.21,1840) 1195.61,1865.61 ; 1883.35,1960 cw(c1883.35,1903.35) 1923.41,1943.41 ccw(c1883.35,1903.35) 1883.35,1960 ; 1883.35,1960 ccw(c1883.35,2016.65) 1923.41,1976.59 cw(c1883.35,2016.65) 1883.35,1960 ; 2266.62,1910.41 cw(c2266.62,1946.62) 2241.01,1921.01 ccw(c2266.62,1946.62) 2266.62,1910.41 ; 2266.62,1910.41 ccw(c2266.62,1874.19) 2241.01,1899.8 cw(c2266.62,1874.19) 2266.62,1910.41 ; 3070.61,1884.39 cw(c3096.21,1910) 3060,1910 ccw(c3096.21,1910) 3070.61,1884.39 ; 3070.61,1884.39 ccw(c3045,1858.79) 3045,1895 cw(c3045,1858.79) 3070.61,1884.39 ; 3382.34,1760 cw(c3382.34,1731.87) 3402.23,1751.76 ccw(c3382.34,1731.87) 3382.34,1760 ; 3382.34,1760 ccw(c3382.34,1788.13) 3402.23,1768.24 cw(c3382.34,1788.13) 3382.34,1760 ; 3410,1812.86 cw(c3457.14,1812.86) 3423.81,1846.19 ccw(c3457.14,1812.86) 3410,1812.86 ; 3410,1812.86 ccw(c3362.86,1812.86) 3396.19,1846.19 cw(c3362.86,1812.86) 3410,1812.86 ; 3410,1907.14 cw(c3362.86,1907.14) 3396.19,1873.81 ccw(c3362.86,1907.14) 3410,1907.14 ; 3410,1907.14 ccw(c3457.14,1907.14) 3423.81,1873.81 cw(c3457.14,1907.14) 3410,1907.14 ; 3797.66,1760 cw(c3797.66,1788.13) 3777.77,1768.24 ccw(c3797.66,1788.13) 3797.66,1760 ; 3797.66,1760 ccw(c3797.66,1731.87) 3777.77,1751.76 cw(c3797.66,1731.87) 3797.66,1760 ; 3838.79,1965 cw(c3838.79,1928.79) 3864.39,1954.39 ccw(c3838.79,1928.79) 3838.79,1965 ; 3838.79,1965 ccw(c3838.79,2001.21) 3864.39,1975.61 cw(c3838.79,2001.21) 3838.79,1965 ; 3900.61,1939.39 cw(c3926.21,1965) 3890,1965 ccw(c3926.21,1965) 3900.61,1939.39 ; 3900.61,1939.39 ccw(c3875,1913.79) 3875,1950 cw(c3875,1913.79) 3900.61,1939.39 ; 2542.81,1910.41 cw(c2542.81,1872.81) 2569.39,1899.39 ccw(c2542.81,1872.81) 2542.81,1910.41 ; 2544.77,1910.41 ccw(c2544.77,1945.23) 2569.39,1920.61 cw(c2544.77,1945.23) 2544.77,1910.41 ; C4.1@3402.23,1774.15 ccw(c3383.48,1792.9) 3410,1792.9 cw(c3383.48,1792.9) C4.1@3402.23,1774.15 ; 3410,1795.18 ccw(c3439.75,1795.18) 3418.71,1774.15 cw(c3439.75,1795.18) 3410,1795.18
  Bottom Layer w20: I1.8@-105,1840 v1(70,1840) ; v1(330,1840) v1(1170,1840) ; pad.0@1940,1960 2180.81,1960 v1(2230.41,1910.41) ; v1(2580,1910) v1(3045,1910) ; v1(3875,1965) 4885,1965 5115,2195 V3.2@5330,2195 ; -56.72,1840 cw(c-56.72,1888.28) -90.86,1854.14 ccw(c-56.72,1888.28) -56.72,1840 ; -56.72,1840 ccw(c-56.72,1791.72) -90.86,1825.86 cw(c-56.72,1791.72) -56.72,1840 ; 33.79,1840 cw(c33.79,1803.79) 59.39,1829.39 ccw(c33.79,1803.79) 33.79,1840 ; 33.79,1840 ccw(c33.79,1876.21) 59.39,1850.61 cw(c33.79,1876.21) 33.79,1840 ; 366.21,1840 cw(c366.21,1876.21) 340.61,1850.61 ccw(c366.21,1876.21) 366.21,1840 ; 366.21,1840 ccw(c366.21,1803.79) 340.61,1829.39 cw(c366.21,1803.79) 366.21,1840 ; 1133.79,1840 cw(c1133.79,1803.79) 1159.39,1829.39 ccw(c1133.79,1803.79) 1133.79,1840 ; 1133.79,1840 ccw(c1133.79,1876.21) 1159.39,1850.61 cw(c1133.79,1876.21) 1133.79,1840 ; 1996.65,1960 cw(c1996.65,2016.65) 1956.59,1976.59 ccw(c1996.65,2016.65) 1996.65,1960 ; 1996.65,1960 ccw(c1996.65,1903.35) 1956.59,1943.41 cw(c1996.65,1903.35) 1996.65,1960 ; 2204.8,1936.01 cw(c2179.19,1910.41) 2215.41,1910.41 ccw(c2179.19,1910.41) 2204.8,1936.01 ; 2204.8,1936.01 ccw(c2230.41,1961.62) 2230.41,1925.41 cw(c2230.41,1961.62) 2204.8,1936.01 ; 2616.21,1910 cw(c2616.21,1946.21) 2590.61,1920.61 ccw(c2616.21,1946.21) 2616.21,1910 ; 2616.21,1910 ccw(c2616.21,1873.79) 2590.61,1899.39 cw(c2616.21,1873.79) 2616.21,1910 ; 3008.79,1910 cw(c3008.79,1873.79) 3034.39,1899.39 ccw(c3008.79,1873.79) 3008.79,1910 ; 3008.79,1910 ccw(c3008.79,1946.21) 3034.39,1920.61 cw(c3008.79,1946.21) 3008.79,1910 ; 3911.21,1965 cw(c3911.21,2001.21) 3885.61,1975.61 ccw(c3911.21,2001.21) 3911.21,1965 ; 3911.21,1965 ccw(c3911.21,1928.79) 3885.61,1954.39 cw(c3911.21,1928.79) 3911.21,1965 ; 5282.86,2195 cw(c5282.86,2147.86) 5316.19,2181.19 ccw(c5282.86,2147.86) 5282.86,2195 ; 5282.86,2195 ccw(c5282.86,2242.14) 5316.19,2208.81 cw(c5282.86,2242.14) 5282.86,2195
IPM_VN: C10.2 I1.17 R15.2 U7.6 | length 5764.5
  Top Layer w10: v1@2406.15,1249.65 cw(c2435.89,1234.02) 2430.33,1267.16 ; v1(2415,1245) 2445,1275 ; v1@2419.65,1236.15 ccw(c2404.02,1265.89) 2437.16,1260.33 ; U7.6@2635,1360 2635,1295 2615,1275 2445,1275 ; 2445,1275 cw(c2420.25,1299.74) 2416.91,1264.91 ccw(c2420.25,1299.74) 2445,1275 ; 2445,1275 ccw(c2469.74,1250.25) 2434.91,1246.91 cw(c2469.74,1250.25) 2445,1275 ; 2635,1300.79 cw(c2694.21,1300.79) 2652.34,1342.66 ccw(c2694.21,1300.79) 2635,1300.79 ; 2635,1300.79 ccw(c2575.79,1300.79) 2617.66,1342.66 cw(c2575.79,1300.79) 2635,1300.79 ; 2635,1324.93 cw(c2670.07,1324.93) 2645.27,1349.73 ccw(c2670.07,1324.93) 2635,1324.93 ; 2635,1324.93 ccw(c2599.93,1324.93) 2624.73,1349.73 cw(c2599.93,1324.93) 2635,1324.93
  Bottom Layer w10: I1.17@-105,500 30,500 250,280 2385,280 2415,310 v1(2415,1245) ; C10.2@2584.53,1460 2669.57,1460 R15.2@2674.57,1455 2635,1415.43 ; U7.6@2635,1360 2635,1415.43 ; 2651.1,1426.15 ccw(c2641.99,1460.15) R15.2@2675.89,1450.69 ; -68.79,500 cw(c-68.79,536.21) -94.39,510.61 ccw(c-68.79,536.21) -68.79,500 ; -68.79,500 ccw(c-68.79,463.79) -94.39,489.39 cw(c-68.79,463.79) -68.79,500 ; -44.64,500 cw(c-44.64,560.36) -87.32,517.68 ccw(c-44.64,560.36) -44.64,500 ; -44.64,500 ccw(c-44.64,439.64) -87.32,482.32 cw(c-44.64,439.64) -44.64,500 ; 2415,1196.72 cw(c2463.28,1196.72) 2429.14,1230.86 ccw(c2463.28,1196.72) 2415,1196.72 ; 2415,1196.72 ccw(c2366.72,1196.72) 2400.86,1230.86 cw(c2366.72,1196.72) 2415,1196.72 ; 2624.73,1460 cw(c2624.73,1500.21) 2596.3,1471.78 ccw(c2624.73,1500.21) 2624.73,1460 ; 2624.73,1460 ccw(c2624.73,1419.79) 2596.3,1448.22 cw(c2624.73,1419.79) 2624.73,1460 ; 2635,1392.83 cw(c2605.16,1392.83) 2625.23,1370.75 ccw(c2605.16,1392.83) 2635,1392.83 ; 2635,1392.83 ccw(c2664.84,1392.83) 2644.77,1370.75 cw(c2664.84,1392.83) 2635,1392.83 ; 2635,1415.43 cw(c2584.63,1415.43) 2618.5,1378.15 ccw(c2584.63,1415.43) 2635,1415.43 ; 2635,1415.43 ccw(c2685.37,1415.43) 2651.5,1378.15 cw(c2685.37,1415.43) 2635,1415.43 ; 2627.04,1460 cw(c2627.04,1411.41) 2661.4,1445.77 ccw(c2627.04,1411.41) 2627.04,1460 ; 2632.17,1460 ccw(c2632.17,1501.33) 2661.4,1472.1 cw(c2632.17,1501.33) 2632.17,1460 ; 2636.06,1416.49 cw(c2674.57,1377.98) 2674.57,1432.44 ccw(c2674.57,1377.98) 2636.06,1416.49 ; 2645.56,1425.99 ccw(c2620.49,1451.06) 2655.94,1451.06 cw(c2620.49,1451.06) 2645.56,1425.99 ; R15.2@2653.13,1433.56 cw(c2674.57,1412.12) 2674.57,1442.44 ccw(c2674.57,1412.12) R15.2@2653.13,1433.56
IPM_VP: C4.2 I1.7 R3.2 U2.6 | length 5286.7
  Top Layer w10: v1(2210,1625) 3343.07,1625 3469.53,1751.46 C4.2@3469.53,1760 R3.2@3544.57,1760 3510,1794.57 ; U2.6@3510,1860 3510,1794.57 ; 2258.28,1625 cw(c2258.28,1673.28) 2224.14,1639.14 ccw(c2258.28,1673.28) 2258.28,1625 ; 2258.28,1625 ccw(c2258.28,1576.72) 2224.14,1610.86 cw(c2258.28,1576.72) 2258.28,1625 ; 3499.61,1760 cw(c3499.61,1715.04) 3531.4,1746.83 ccw(c3499.61,1715.04) 3499.61,1760 ; 3499.61,1760 ccw(c3499.61,1804.96) 3531.4,1773.17 cw(c3499.61,1804.96) 3499.61,1760 ; 3509.73,1760 cw(c3509.73,1800.21) 3481.3,1771.78 ccw(c3509.73,1800.21) 3509.73,1760 ; 3509.73,1760 ccw(c3509.73,1719.79) 3481.3,1748.22 cw(c3509.73,1719.79) 3509.73,1760 ; 3510,1794.56 ccw(c3539.5,1824.06) 3543,1782.49 cw(c3539.5,1824.06) 3510,1794.56 ; 3510,1800.79 cw(c3569.21,1800.79) 3527.34,1842.66 ccw(c3569.21,1800.79) 3510,1800.79 ; 3510,1800.79 ccw(c3450.79,1800.79) 3492.66,1842.66 cw(c3450.79,1800.79) 3510,1800.79 ; 3510,1824.93 cw(c3545.07,1824.93) 3520.27,1849.73 ccw(c3545.07,1824.93) 3510,1824.93 ; 3510,1824.93 ccw(c3474.93,1824.93) 3499.73,1849.73 cw(c3474.93,1824.93) 3510,1824.93 ; 3515.56,1789.01 cw(c3490.49,1763.94) 3525.94,1763.94 ccw(c3490.49,1763.94) 3515.56,1789.01 ; R3.2@3525.23,1779.34 ccw(c3541.87,1795.97) 3543.84,1772.53 cw(c3541.87,1795.97) R3.2@3525.23,1779.34
  Bottom Layer w10: I1.7@-105,1920 95,1920 390,1625 v1(2210,1625) ; -68.79,1920 cw(c-68.79,1956.21) -94.39,1930.61 ccw(c-68.79,1956.21) -68.79,1920 ; -68.79,1920 ccw(c-68.79,1883.79) -94.39,1909.39 cw(c-68.79,1883.79) -68.79,1920 ; -44.64,1920 cw(c-44.64,1980.36) -87.32,1937.68 ccw(c-44.64,1980.36) -44.64,1920 ; -44.64,1920 ccw(c-44.64,1859.64) -87.32,1902.32 cw(c-44.64,1859.64) -44.64,1920 ; 2161.72,1625 cw(c2161.72,1576.72) 2195.86,1610.86 ccw(c2161.72,1576.72) 2161.72,1625 ; 2161.72,1625 ccw(c2161.72,1673.28) 2195.86,1639.14 cw(c2161.72,1673.28) 2161.72,1625